# EAGLE board Keyboard (EAGLE 6.3), part 1 of 2
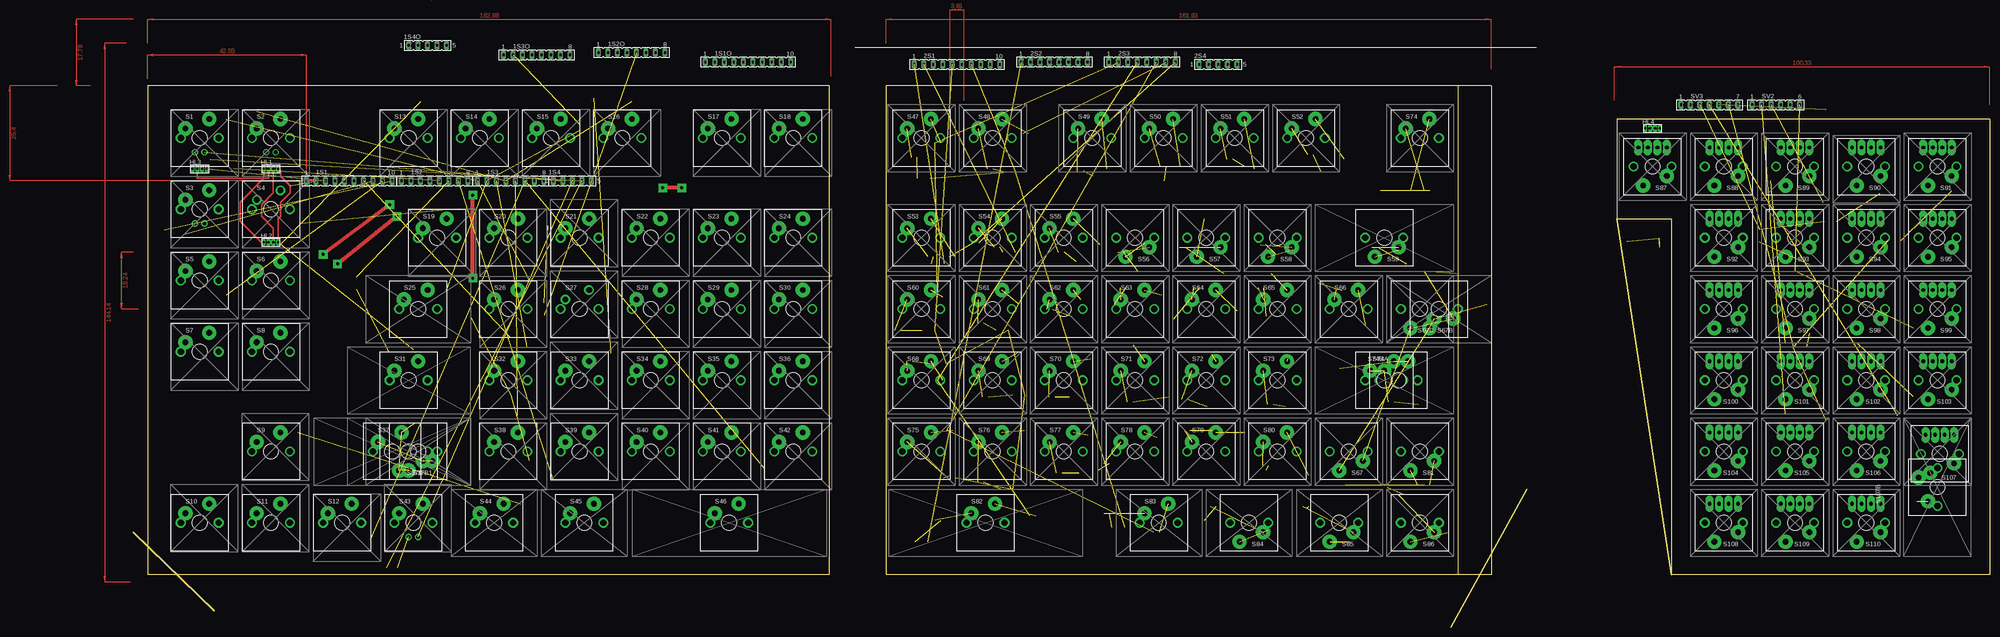
[diagram p0: board, top side]
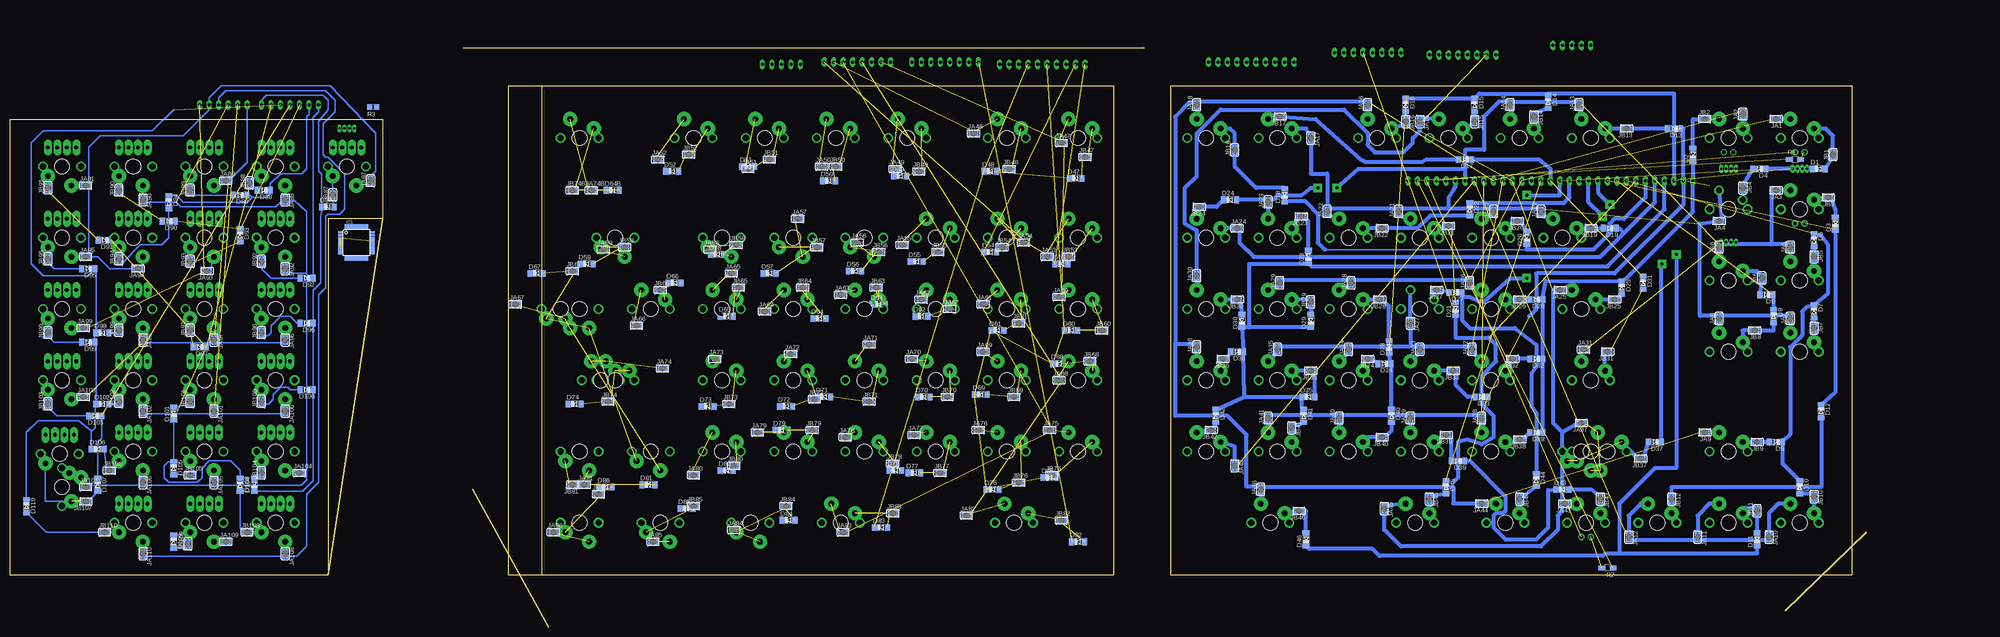
[diagram p1: board, bottom side, seen from below]

Size 496.57 x 154.94 mm. Coordinates in mm from the lower left corner, seen from the top.
Outline: 354.33,144.78 363.22,144.78 363.22,13.97 354.33,13.97
Outline: 354.33,144.78 201.3,144.78 201.3,13.97 354.33,13.97
Outline: 396.88,109.22 396.88,135.89 496.57,135.89 496.57,13.97 411.48,13.97
Outline: 375.29,154.94 193.04,154.94
Outline: 396.88,109.22 411.48,109.22 411.48,13.97
Outline: 396.88,109.22 411.48,13.97
Outline: 354.33,144.78 354.33,13.97
Outline: 0,25.4 21.59,4.45
Outline: 372.75,36.83 352.43,0
Outline: 186.06,144.78 186.06,13.97 3.81,13.97 3.81,144.78 186.06,144.78
Copper layers (1*16): Top 0.035mm / dielectric 1.5mm / Bottom 0.035mm
Design rules "default": minimum track width 10mil, minimum drill 24mil, track to track 8mil, track to pad 8mil, pad to pad 8mil, via to via 8mil, smd to smd 8mil, copper to edge 40mil, drill to drill 8mil, minimum pad ring 10mil, minimum via ring 8mil, stop-mask expansion 4mil, vias tented up to drill 0mil, thermal gap 10mil

## Footprints (pad centres in the part's own frame; a part is rotated, then mirrored left to right if it is on the bottom)
FE10 = drill 0.813 long: 1 -11.43,0; 2 -8.89,0; 3 -6.35,0; 4 -3.81,0; 5 -1.27,0; 6 1.27,0; 7 3.81,0; 8 6.35,0; 9 8.89,0; 10 11.43,0
FE08 = drill 0.813 long: 1 -8.89,0; 2 -6.35,0; 3 -3.81,0; 4 -1.27,0; 5 1.27,0; 6 3.81,0; 7 6.35,0; 8 8.89,0
FE05-1 = drill 0.813 long: 1 -5.08,0; 2 -2.54,0; 3 0,0; 4 2.54,0; 5 5.08,0
SOD80C = smd 1.4 x 1.8 bottom: A -1.7,0; C 1.7,0
RGB2X5 = drill 0.6 long: 1 -1.95,-0.585; 2 -0.65,-0.585; 3 0.65,-0.585; 4 1.95,-0.585
TQFP32-08 = smd 1.27 x 0.559: 1 -4.293,2.8; 2 -4.293,2; 3 -4.293,1.2; 4 -4.293,0.4; 5 -4.293,-0.4; 6 -4.293,-1.2; 7 -4.293,-2; 8 -4.293,-2.8; 17 4.293,-2.8; 18 4.293,-2; 19 4.293,-1.2; 20 4.293,-0.4; 21 4.293,0.4; 22 4.293,1.2; 23 4.293,2; 24 4.293,2.8 | smd 0.559 x 1.27: 9 -2.8,-4.293; 10 -2,-4.293; 11 -1.2,-4.293; 12 -0.4,-4.293; 13 0.4,-4.293; 14 1.2,-4.293; 15 2,-4.293; 16 2.8,-4.293; 25 2.8,4.293; 26 2,4.293; 27 1.2,4.293; 28 0.4,4.293; 29 -0.4,4.293; 30 -1.2,4.293; 31 -2,4.293; 32 -2.8,4.293
SJ = smd 1.168 x 1.6: 1 -0.762,0; 2 0.762,0
SJ' = smd 1.168 x 1.6 bottom: 1 0.762,0; 2 -0.762,0
R1206W = smd 1.8 x 1.2: 1 -1.499,0; 2 1.499,0
R0805 = smd 1.3 x 1.5: 1 -0.95,0; 2 0.95,0
CHERRY-MX-LED = drill 1.016 pad 1.676: LED1 -1.27,-3.81; LED2 1.27,-3.81 | drill 0.8 pad 1.27: P$1 0,0 | drill 1.714 pad 1.93: P$3 -5.08,0; P$4 5.08,0 | drill 1.5 pad 3.81: SW1 -3.81,2.54; SW2 2.54,5.08 | hole 4: 0,0
CHERRY-MX@1 = drill 1.714 pad 1.93: P$3 -5.08,0; P$4 5.08,0 | drill 1.5 pad 2.54: SW1 -3.81,2.54; SW2 2.54,5.08 | hole 4: 0,0
CHERRY-MX = drill 0.8: P$1 0,0 | drill 1.714 pad 1.93: P$3 -5.08,0; P$4 5.08,0 | drill 1.5 pad 3.81: SW1 -3.81,2.54; SW2 2.54,5.08 | hole 4: 0,0
CHERRY-MX-4P = drill 1.016 pad 2.184 long: D1 -3.81,-5.08; D2 3.81,-5.08; LED1 -1.27,-5.08; LED2 1.27,-5.08 | drill 1.714 pad 1.93: P$3 -5.08,0; P$4 5.08,0 | drill 1.5 pad 3.81: SW1 -3.81,2.54; SW2 2.54,5.08 | hole 4: 0,0
FE06 = drill 0.813 long: 1 -6.35,0; 2 -3.81,0; 3 -1.27,0; 4 1.27,0; 5 3.81,0; 6 6.35,0
FE07 = drill 0.813 long: 1 -7.62,0; 2 -5.08,0; 3 -2.54,0; 4 0,0; 5 2.54,0; 6 5.08,0; 7 7.62,0

## Placement (x,y rotation side)
1S1  [FE10]  57.78,119.38 0 top
1S1O  [FE10]  164.46,151.13 0 top
1S2  [FE08]  80.64,119.38 0 top
1S2O  [FE08]  133.35,153.67 0 top
1S3  [FE08]  100.97,119.38 0 top
1S3O  [FE08]  107.95,153.04 0 top
1S4  [FE05-1]  117.47,119.38 0 top
1S4O  [FE05-1]  78.74,155.58 0 top
2S1  [FE10]  220.35,150.5 0 top
2S2  [FE08]  246.38,151.13 0 top
2S3  [FE08]  269.88,151.13 0 top
2S4  [FE05-1]  290.19,150.5 0 top
D1  LL4148  [SOD80C]  12.7,122.55 0 top
D2  LL4148  [SOD80C]  46.35,126.36 270 top
D3  LL4148  [SOD80C]  8.25,107.95 270 top
D4  LL4148  [SOD80C]  28.58,122.55 180 top
D5  LL4148  [SOD80C]  13.97,103.5 90 top
D6  LL4148  [SOD80C]  26.67,88.9 180 top
D7  LL4148  [SOD80C]  13.97,84.45 90 top
D8  LL4148  [SOD80C]  24.77,83.19 90 top
D9  LL4148  [SOD80C]  24.13,49.53 180 top
D10  LL4148  [SOD80C]  17.78,37.46 90 top
D11  LL4148  [SOD80C]  29.21,23.49 270 top
D12  LL4148  [SOD80C]  12.06,57.78 90 top
D13  LL4148  [SOD80C]  51.44,133.35 180 top
D14  LL4148  [SOD80C]  85.09,140.5 90 top
D15  LL4148  [SOD80C]  104.78,139.7 90 top
D16  LL4148  [SOD80C]  123.19,139.7 90 top
D17  LL4148  [SOD80C]  107.31,125.09 180 top
D18  LL4148  [SOD80C]  155.57,115.57 270 top
D19  LL4148  [SOD80C]  68.58,106.68 180 top
D20  LL4148  [SOD80C]  90.8,104.14 270 top
D21  LL4148  [SOD80C]  109.86,85.09 270 top
D22  LL4148  [SOD80C]  106.05,111.76 90 top
D23  LL4148  [SOD80C]  149.23,99.06 270 top
D24  LL4148  [SOD80C]  170.18,114.3 0 top
D25  LL4148  [SOD80C]  65.41,90.8 90 top
D26  LL4148  [SOD80C]  88.27,87.63 180 top
D27  LL4148  [SOD80C]  109.86,89.53 180 top
D28  LL4148  [SOD80C]  127.64,74.93 270 top
D29  LL4148  [SOD80C]  148.59,81.91 270 top
D30  LL4148  [SOD80C]  167,81.91 270 top
D31  LL4148  [SOD80C]  59.69,92.08 90 top
D32  LL4148  [SOD80C]  88.27,71.75 180 top
D33  LL4148  [SOD80C]  102.87,61.59 180 top
D34  LL4148  [SOD80C]  128.9,70.48 180 top
D35  LL4148  [SOD80C]  149.23,61.59 0 top
D36  LL4148  [SOD80C]  168.27,73.66 180 top
D37  LL4148  [SOD80C]  56.52,49.53 180 top
D38  LL4148  [SOD80C]  88.27,52.07 180 top
D39  LL4148  [SOD80C]  109.22,44.45 180 top
D40  LL4148  [SOD80C]  127,56.52 90 top
D41  LL4148  [SOD80C]  150.5,56.52 90 top
D42  LL4148  [SOD80C]  173.99,56.52 90 top
D43  LL4148  [SOD80C]  81.28,36.83 0 top
D44  LL4148  [SOD80C]  88.27,39.37 90 top
D45  LL4148  [SOD80C]  112.39,37.46 90 top
D46  LL4148  [SOD80C]  149.86,23.49 270 top
D47  LL4148  [SOD80C]  211.45,120.02 0 top
D48  LL4148  [SOD80C]  234.31,121.92 0 top
D49  LL4148  [SOD80C]  258.44,120.65 0 top
D50  LL4148  [SOD80C]  277.5,119.38 0 top
D51  LL4148  [SOD80C]  299.09,123.19 0 top
D52  LL4148  [SOD80C]  319.41,121.92 0 top
D53  LL4148  [SOD80C]  215.26,97.16 0 top
D54  LL4148  [SOD80C]  234.31,100.33 0 top
D55  LL4148  [SOD80C]  254,97.79 0 top
D56  LL4148  [SOD80C]  270.51,95.25 0 top
D57  LL4148  [SOD80C]  293.37,94.61 0 top
D58  LL4148  [SOD80C]  307.34,99.69 0 top
D59  LL4148  [SOD80C]  342.26,97.16 0 top
D60  LL4148  [SOD80C]  212.73,79.38 0 top
D61  LL4148  [SOD80C]  232.41,79.38 0 top
D62  LL4148  [SOD80C]  252.73,83.19 0 top
D63  LL4148  [SOD80C]  264.16,86.36 0 top
D64  LL4148  [SOD80C]  280.04,82.55 0 top
D64B  LL4148  [SOD80C]  335.28,116.84 0 top
D65  LL4148  [SOD80C]  304.8,83.19 0 top
D66  LL4148  [SOD80C]  318.77,92.08 0 top
D67  LL4148  [SOD80C]  355.6,94.61 0 top
D68  LL4148  [SOD80C]  215.9,70.48 0 top
D69  LL4148  [SOD80C]  236.86,62.23 0 top
D70  LL4148  [SOD80C]  252.1,61.59 0 top
D71  LL4148  [SOD80C]  278.76,61.59 0 top
D72  LL4148  [SOD80C]  288.93,59.05 0 top
D73  LL4148  [SOD80C]  309.88,59.05 0 top
D74  LL4148  [SOD80C]  345.44,59.69 0 top
D75  LL4148  [SOD80C]  218.44,40 0 top
D76  LL4148  [SOD80C]  233.68,36.83 0 top
D77  LL4148  [SOD80C]  254.63,41.27 0 top
D78  LL4148  [SOD80C]  259.72,41.91 0 top
D79  LL4148  [SOD80C]  290.19,52.7 0 top
D80  LL4148  [SOD80C]  304.8,41.91 0 top
D81  LL4148  [SOD80C]  325.75,38.1 0 top
D82  LL4148  [SOD80C]  210.82,22.86 0 top
D83  LL4148  [SOD80C]  263.53,26.67 0 top
D84  LL4148  [SOD80C]  288.29,28.58 0 top
D85  LL4148  [SOD80C]  315.6,31.75 0 top
D86  LL4148  [SOD80C]  337.19,37.46 0 top
D87  LL4148  [SOD80C]  411.48,112.39 0 top
D88  LL4148  [SOD80C]  428.62,116.84 180 top
D89  LL4148  [SOD80C]  434.98,115.57 180 top
D90  LL4148  [SOD80C]  454.03,108.58 180 top
D91  LL4148  [SOD80C]  471.17,103.5 180 top
D92  LL4148  [SOD80C]  417.19,93.34 180 top
D93  LL4148  [SOD80C]  434.98,104.77 90 top
D94  LL4148  [SOD80C]  454.03,113.66 90 top
D95  LL4148  [SOD80C]  475.62,95.89 180 top
D96  LL4148  [SOD80C]  417.19,81.28 180 top
D97  LL4148  [SOD80C]  445.77,74.93 180 top
D98  LL4148  [SOD80C]  471.81,78.74 0 top
D99  LL4148  [SOD80C]  475.62,76.2 180 top
D100  LL4148  [SOD80C]  417.19,63.5 180 top
D101  LL4148  [SOD80C]  452.75,57.15 270 top
D102  LL4148  [SOD80C]  471.81,59.69 0 top
D103  LL4148  [SOD80C]  473.71,56.52 180 top
D104  LL4148  [SOD80C]  431.17,38.1 270 top
D105  LL4148  [SOD80C]  452.75,42.55 90 top
D106  LL4148  [SOD80C]  473.07,47.62 0 top
D107  LL4148  [SOD80C]  473.07,38.1 90 top
D108  LL4148  [SOD80C]  434.98,38.1 90 top
D109  LL4148  [SOD80C]  452.75,22.86 90 top
D110  LL4148  [SOD80C]  492.12,32.38 90 top
HL1  [RGB2X5]  36.83,123.19 0 top
HL2  [RGB2X5]  36.83,103.5 0 top
HL3  [RGB2X5]  17.78,123.19 0 top
HL4  [RGB2X5]  406.4,133.99 0 top
IC1  MEGA8-AI  [TQFP32-08]  403.86,102.87 0 bottom
JA1  [SJ]  24.13,135.89 180 bottom
JA2  [SJ]  33.02,137.16 90 bottom
JA3  [SJ]  24.13,116.84 180 bottom
JA4  [SJ]  39.37,108.58 180 bottom
JA5  [SJ]  20.32,101.6 90 bottom
JA6  [SJ]  39.37,101.6 90 bottom
JA7  [SJ]  20.32,82.55 90 bottom
JA8  [SJ]  39.37,82.55 90 bottom
JA9  [SJ]  43.18,52.07 180 bottom
JA10  [SJ]  26.03,24.13 270 bottom
JA11  [SJ]  45.09,24.13 270 bottom
JA12  [SJ]  63.5,24.13 270 bottom
JA13  [SJ']  76.83,139.7 270 top
JA14  [SJ']  95.25,139.7 270 top
JA15  [SJ']  119.38,135.26 90 top
JA16  [SJ']  133.35,139.7 270 top
JA17  [SJ']  148.59,130.81 90 top
JA18  [SJ']  179.07,139.7 270 top
JA19  [SJ']  87,111.12 270 top
JA20  [SJ']  99.69,111.12 270 top
JA21  [SJ']  125.1,111.12 270 top
JA22  [SJ']  144.14,111.12 270 top
JA23  [SJ']  160.02,113.66 270 top
JA24  [SJ']  168.27,106.68 0 top
JA25  [SJ']  81.92,90.17 180 top
JA26  [SJ']  106.05,92.08 270 top
JA27  [SJ']  121.92,81.28 90 top
JA28  [SJ']  137.8,92.08 270 top
JA29  [SJ']  156.85,92.08 270 top
JA30  [SJ']  179.07,93.98 270 top
JA31  [SJ']  75.56,74.3 0 top
JA32  [SJ']  105.41,74.3 270 top
JA33  [SJ']  119.38,74.3 270 top
JA34  [SJ']  138.43,74.3 270 top
JA35  [SJ']  157.48,74.3 270 top
JA36  [SJ']  179.07,74.93 270 top
JA37  [SJ']  76.2,54.61 180 top
JA38  [SJ']  102.87,55.88 270 top
JA39  [SJ']  121.92,55.88 270 top
JA40  [SJ']  140.97,55.88 270 top
JA41  [SJ']  160.02,55.88 270 top
JA42  [SJ']  168.91,43.18 90 top
JA43  [SJ']  80.64,33.02 180 top
JA44  [SJ']  102.87,33.02 180 top
JA45  [SJ']  128.9,31.75 90 top
JA46  [SJ']  161.93,36.83 270 top
JA47  [SJ']  215.26,129.54 0 top
JA48  [SJ']  238.76,132.08 0 top
JA49  [SJ']  259.72,122.55 0 top
JA50  [SJ']  279.4,123.19 0 top
JA51  [SJ']  299.09,122.55 0 top
JA52  [SJ']  323.22,125.09 0 top
JA53  [SJ']  219.07,99.06 0 top
JA54  [SJ']  225.43,102.87 0 top
JA55  [SJ']  257.81,102.23 0 top
JA56  [SJ']  269.88,102.87 0 top
JA57  [SJ']  285.75,109.22 0 top
JA58  [SJ']  309.25,100.97 0 top
JA59  [SJ']  337.82,100.97 0 top
JA60  [SJ']  215.9,88.27 0 top
JA61  [SJ']  236.22,86.36 0 top
JA62  [SJ']  252.73,87.63 0 top
JA63  [SJ']  274.32,88.9 0 top
JA64  [SJ']  294.64,84.45 0 top
JA65  [SJ']  303.53,94.61 0 top
JA66  [SJ']  328.93,80.64 0 top
JA67  [SJ']  361.31,86.36 0 top
JA68  [SJ']  215.9,66.04 0 top
JA69  [SJ']  236.22,73.66 0 top
JA70  [SJ']  255.27,71.75 0 top
JA71  [SJ']  266.7,75.56 0 top
JA72  [SJ']  287.66,73.02 0 top
JA73  [SJ']  307.98,71.75 0 top
JA74  [SJ']  321.94,69.22 0 top
JA74B  [SJ']  341,116.84 0 top
JA75  [SJ']  218.44,52.7 0 top
JA76  [SJ']  237.49,52.7 0 top
JA77  [SJ']  254.63,51.43 0 top
JA78  [SJ']  273.05,50.8 0 top
JA79  [SJ']  296.55,52.07 0 top
JA80  [SJ']  313.69,40.64 0 top
JA81  [SJ']  342.9,38.1 0 top
JA82  [SJ']  240.67,29.84 0 top
JA83  [SJ']  273.69,25.4 0 top
JA84  [SJ']  302.9,26.03 0 top
JA85  [SJ']  324.49,22.86 0 top
JA86  [SJ']  351.16,25.4 0 top
JA87  [SJ']  400.05,119.38 270 top
JA88  [SJ']  422.91,114.3 90 top
JA89  [SJ']  438.79,119.38 0 top
JA90  [SJ']  461.01,114.3 90 top
JA91  [SJ']  476.25,118.11 0 top
JA92  [SJ']  422.91,95.89 90 top
JA93  [SJ']  443.87,95.25 180 top
JA94  [SJ']  462.28,95.89 180 top
JA95  [SJ']  476.25,99.06 0 top
JA96  [SJ']  422.91,76.83 90 top
JA97  [SJ']  441.96,76.83 90 top
JA98  [SJ']  461.01,76.83 90 top
JA99  [SJ']  476.88,80.01 0 top
JA100  [SJ']  422.91,57.78 90 top
JA101  [SJ']  441.96,57.78 90 top
JA102  [SJ']  461.01,57.78 90 top
JA103  [SJ']  476.88,61.59 0 top
JA104  [SJ']  419.1,41.27 0 top
JA105  [SJ']  441.96,38.73 90 top
JA106  [SJ']  461.01,38.73 90 top
JA107  [SJ']  476.25,37.46 0 top
JA108  [SJ']  422.91,19.69 90 top
JA109  [SJ']  438.79,22.86 0 top
JA110  [SJ']  461.01,19.69 90 top
JB1  [SJ']  8.89,126.36 270 top
JB2  [SJ]  43.18,135.89 0 bottom
JB3  [SJ']  10.16,114.94 180 top
JB4  [SJ]  33.02,117.47 270 bottom
JB5  [SJ]  13.97,99.06 270 bottom
JB6  [SJ]  27.94,93.34 90 bottom
JB7  [SJ]  13.97,80.01 270 bottom
JB8  [SJ]  29.84,79.38 180 bottom
JB9  [SJ]  29.21,49.53 180 bottom
JB10  [SJ]  13.97,34.92 270 bottom
JB11  [SJ]  29.21,31.12 90 bottom
JB12  [SJ]  52.07,34.29 270 bottom
JB13  [SJ]  64.14,133.35 180 bottom
JB14  [SJ]  88.9,136.53 270 bottom
JB15  [SJ]  104.78,135.26 270 bottom
JB16  [SJ]  123.19,135.26 270 bottom
JB17  [SJ]  156.85,136.53 180 bottom
JB18  [SJ']  168.91,127.64 270 top
JB19  [SJ']  73.66,106.68 180 top
JB20  [SJ']  93.34,108.58 180 top
JB21  [SJ']  111.76,107.31 180 top
JB22  [SJ']  129.54,106.68 180 top
JB23  [SJ']  151.13,109.86 180 top
JB24  [SJ']  178.44,112.39 180 top
JB25  [SJ']  67.31,87.63 180 top
JB26  [SJ']  92.71,87.63 180 top
JB27  [SJ']  114.94,90.17 180 top
JB28  [SJ']  130.18,87.63 180 top
JB29  [SJ']  148.59,87 270 top
JB30  [SJ']  168.27,87.63 180 top
JB31  [SJ']  69.22,73.66 180 top
JB32  [SJ']  94.61,71.75 180 top
JB33  [SJ']  110.49,68.58 180 top
JB34  [SJ']  133.35,71.75 180 top
JB35  [SJ']  148.59,68.58 180 top
JB36  [SJ']  172.08,71.75 180 top
JB37  [SJ']  60.33,45.09 180 top
JB38  [SJ']  92.71,50.16 180 top
JB39  [SJ']  112.39,51.43 180 top
JB40  [SJ']  129.54,50.8 180 top
JB41  [SJ']  153.67,53.34 90 top
JB42  [SJ']  175.26,52.7 180 top
JB43  [SJ']  71.12,34.29 90 top
JB44  [SJ']  92.71,34.29 90 top
JB45  [SJ']  116.84,34.29 90 top
JB46  [SJ']  151.76,31.12 180 top
JB47  [SJ']  208.92,125.73 0 top
JB48  [SJ']  229.24,122.55 0 top
JB49  [SJ']  253.37,121.92 0 top
JB50  [SJ']  275.59,123.19 0 top
JB51  [SJ']  293.37,125.09 0 top
JB52  [SJ']  314.96,126.36 0 top
JB53  [SJ']  213.36,99.06 0 top
JB54  [SJ']  231.14,101.6 0 top
JB55  [SJ']  248.29,100.33 0 top
JB56  [SJ']  264.16,100.33 0 top
JB57  [SJ']  280.67,101.6 0 top
JB58  [SJ']  302.26,102.23 0 top
JB59  [SJ']  332.11,101.6 0 top
JB60  [SJ']  204.47,79.38 0 top
JB61  [SJ']  226.69,81.28 0 top
JB62  [SJ']  245.11,85.09 0 top
JB63  [SJ']  264.8,90.8 0 top
JB64  [SJ']  284.48,90.8 0 top
JB65  [SJ']  301.62,90.8 0 top
JB66  [SJ']  322.58,90.17 0 top
JB67  [SJ']  346.07,95.25 0 top
JB68  [SJ']  207.64,71.12 0 top
JB69  [SJ']  227.96,61.59 0 top
JB70  [SJ']  245.75,61.59 0 top
JB71  [SJ']  266.7,60.32 0 top
JB72  [SJ']  281.31,60.96 0 top
JB73  [SJ']  304.17,59.69 0 top
JB74  [SJ']  336.55,60.32 0 top
JB74B  [SJ']  346.07,116.84 0 top
JB75  [SJ']  217.81,40.64 0 top
JB76  [SJ']  226.69,38.73 0 top
JB77  [SJ']  247.65,41.27 0 top
JB78  [SJ']  260.35,43.81 0 top
JB79  [SJ']  281.94,52.7 0 top
JB80  [SJ']  302.9,43.18 0 top
JB81  [SJ']  346.07,38.1 180 top
JB82  [SJ']  215.26,28.58 0 top
JB83  [SJ']  260.35,30.48 0 top
JB84  [SJ']  288.93,32.38 0 top
JB85  [SJ']  313.69,32.38 0 top
JB86  [SJ']  339.09,35.56 0 top
JB87  [SJ']  410.21,115.57 270 top
JB88  [SJ']  432.44,118.75 270 top
JB89  [SJ']  448.31,116.84 270 top
JB90  [SJ']  467.36,116.84 270 top
JB91  [SJ']  486.41,117.47 270 top
JB92  [SJ']  429.26,97.79 270 top
JB93  [SJ']  448.31,97.79 270 top
JB94  [SJ']  467.36,98.42 270 top
JB95  [SJ']  486.41,98.42 270 top
JB96  [SJ']  429.26,78.74 270 top
JB97  [SJ']  448.31,79.38 270 top
JB98  [SJ']  467.36,79.38 270 top
JB99  [SJ']  486.41,78.74 270 top
JB100  [SJ']  429.26,60.32 270 top
JB101  [SJ']  448.31,60.32 270 top
JB102  [SJ']  467.36,60.32 270 top
JB103  [SJ']  486.41,59.69 270 top
JB104  [SJ']  429.26,41.27 270 top
JB105  [SJ']  448.31,40.64 0 top
JB106  [SJ']  469.9,41.91 0 top
JB107  [SJ']  476.25,33.66 180 top
JB108  [SJ']  433.07,25.4 0 top
JB109  [SJ']  448.94,22.23 270 top
JB110  [SJ']  471.17,25.4 0 top
R1  1k  [R1206W]  19.05,125.09 0 bottom
R2  1k  [R1206W]  69.22,15.88 180 bottom
R3  1k  [R0805]  399.42,139.07 180 bottom
S1  Scroll Lock  [CHERRY-MX-LED]  17.78,130.81 0 top
S2  ESC  [CHERRY-MX-LED]  36.83,130.81 0 top
S3  Ins  [CHERRY-MX-LED]  17.78,111.76 0 top
S4  Pause  [CHERRY-MX@1]  36.83,111.76 0 top
S5  Home  [CHERRY-MX]  17.78,92.71 0 top
S6  P Up  [CHERRY-MX]  36.83,92.71 0 top
S7  End  [CHERRY-MX]  17.78,73.66 0 top
S8  P Dn  [CHERRY-MX]  36.83,73.66 0 top
S9  Up  [CHERRY-MX]  36.83,46.99 0 top
S10  Left  [CHERRY-MX]  17.78,27.94 0 top
S11  Down  [CHERRY-MX]  36.83,27.94 0 top
S12  Right  [CHERRY-MX]  55.88,27.94 0 top
S13  F1  [CHERRY-MX]  73.66,130.81 0 top
S14  F2  [CHERRY-MX]  92.71,130.81 0 top
S15  F3  [CHERRY-MX]  111.76,130.81 0 top
S16  F4  [CHERRY-MX]  130.81,130.81 0 top
S17  F5  [CHERRY-MX]  157.48,130.81 0 top
S18  F6  [CHERRY-MX]  176.53,130.81 0 top
S19  1  [CHERRY-MX]  81.28,104.14 0 top
S20  2  [CHERRY-MX]  100.33,104.14 0 top
S21  3  [CHERRY-MX]  119.38,104.14 0 top
S22  4  [CHERRY-MX]  138.43,104.14 0 top
S23  5  [CHERRY-MX]  157.48,104.14 0 top
S24  6  [CHERRY-MX]  176.53,104.14 0 top
S25  TAB  [CHERRY-MX]  76.2,85.09 0 top
S26  Q  [CHERRY-MX]  100.33,85.09 0 top
S27  W  [CHERRY-MX@1]  119.38,85.09 0 top
S28  E  [CHERRY-MX]  138.43,85.09 0 top
S29  R  [CHERRY-MX]  157.48,85.09 0 top
S30  T  [CHERRY-MX]  176.53,85.09 0 top
S31  LCtrl  [CHERRY-MX]  73.66,66.04 0 top
S32  A  [CHERRY-MX]  100.33,66.04 0 top
S33  S  [CHERRY-MX]  119.38,66.04 0 top
S34  D  [CHERRY-MX]  138.43,66.04 0 top
S35  F  [CHERRY-MX]  157.48,66.04 0 top
S36  G  [CHERRY-MX]  176.53,66.04 0 top
S37  L Shift  [CHERRY-MX]  69.22,46.99 0 top
S37B  L Shift  [CHERRY-MX]  73.66,46.99 180 top
S37B1  L Shift  [CHERRY-MX]  76.2,46.99 180 top
S38  Z  [CHERRY-MX]  100.33,46.99 0 top
S39  X  [CHERRY-MX]  119.38,46.99 0 top
S40  C  [CHERRY-MX]  138.43,46.99 0 top
S41  V  [CHERRY-MX]  157.48,46.99 0 top
S42  B  [CHERRY-MX]  176.53,46.99 0 top
S43  Caps Lock  [CHERRY-MX-LED]  74.93,27.94 0 top
S44  Alt  [CHERRY-MX]  96.52,27.94 0 top
S45  Menu(Win)  [CHERRY-MX]  120.65,27.94 0 top
S46  Space  [CHERRY-MX]  159.38,27.94 0 top
S47  F7  [CHERRY-MX]  210.82,130.81 0 top
S48  F8  [CHERRY-MX]  229.87,130.81 0 top
S49  F9  [CHERRY-MX]  256.54,130.81 0 top
S50  F10  [CHERRY-MX]  275.59,130.81 0 top
S51  F11  [CHERRY-MX]  294.64,130.81 0 top
S52  F12  [CHERRY-MX]  313.69,130.81 0 top
S53  7  [CHERRY-MX]  210.82,104.14 0 top
S54  8  [CHERRY-MX]  229.87,104.14 0 top
S55  9  [CHERRY-MX]  248.92,104.14 0 top
S56  0  [CHERRY-MX]  267.97,104.14 180 top
S57  -  [CHERRY-MX]  287.02,104.14 180 top
S58  =  [CHERRY-MX]  306.07,104.14 180 top
S59  BS  [CHERRY-MX]  334.65,104.14 180 top
S60  Y  [CHERRY-MX]  210.82,85.09 0 top
S61  U  [CHERRY-MX]  229.87,85.09 0 top
S62  I  [CHERRY-MX]  248.92,85.09 0 top
S63  O  [CHERRY-MX]  267.97,85.09 0 top
S64  P  [CHERRY-MX]  287.02,85.09 0 top
S65  [  [CHERRY-MX]  306.07,85.09 0 top
S66  ]  [CHERRY-MX]  325.12,85.09 0 top
S67  |  [CHERRY-MX]  325.12,46.99 180 top
S67B  |  [CHERRY-MX]  349.25,85.09 180 top
S67C  |  [CHERRY-MX]  344.17,85.09 180 top
S68  H  [CHERRY-MX]  210.82,66.04 0 top
S69  J  [CHERRY-MX]  229.87,66.04 0 top
S70  K  [CHERRY-MX]  248.92,66.04 0 top
S71  L  [CHERRY-MX]  267.97,66.04 0 top
S72  :  [CHERRY-MX]  287.02,66.04 0 top
S73  "  [CHERRY-MX]  306.07,66.04 0 top
S74  Del  [CHERRY-MX]  344.17,130.81 0 top
S74A  Enter  [CHERRY-MX]  338.46,66.04 0 top
S74B  Enter  [CHERRY-MX]  334.65,66.04 0 top
S75  N  [CHERRY-MX]  210.82,46.99 0 top
S76  M  [CHERRY-MX]  229.87,46.99 0 top
S77  <  [CHERRY-MX]  248.92,46.99 0 top
S78  >  [CHERRY-MX]  267.97,46.99 0 top
S79  ~  [CHERRY-MX]  287.02,46.99 0 top
S80  ?  [CHERRY-MX]  306.07,46.99 0 top
S81  R Shift  [CHERRY-MX]  344.17,46.99 180 top
S82  Space  [CHERRY-MX]  227.96,27.94 0 top
S83  Mouse2(Menu)  [CHERRY-MX]  274.32,27.94 0 top
S84  Alt  [CHERRY-MX]  298.45,27.94 180 top
S85  RCtrl  [CHERRY-MX]  322.58,27.94 180 top
S86  PrtScr  [CHERRY-MX]  344.17,27.94 180 top
S87  Num  [CHERRY-MX-4P]  406.4,123.19 180 top
S88  D  [CHERRY-MX-4P]  425.45,123.19 180 top
S89  E  [CHERRY-MX-4P]  444.5,123.19 180 top
S90  F  [CHERRY-MX-4P]  463.55,123.19 180 top
S91  /  [CHERRY-MX-4P]  482.6,123.19 180 top
S92  A  [CHERRY-MX-4P]  425.45,104.14 180 top
S93  B  [CHERRY-MX-4P]  444.5,104.14 180 top
S94  C  [CHERRY-MX-4P]  463.55,104.14 180 top
S95  *  [CHERRY-MX-4P]  482.6,104.14 180 top
S96  7  [CHERRY-MX-4P]  425.45,85.09 180 top
S97  8  [CHERRY-MX-4P]  444.5,85.09 180 top
S98  9  [CHERRY-MX-4P]  463.55,85.09 180 top
S99  -  [CHERRY-MX-4P]  482.6,85.09 180 top
S100  4  [CHERRY-MX-4P]  425.45,66.04 180 top
S101  5  [CHERRY-MX-4P]  444.5,66.04 180 top
S102  6  [CHERRY-MX-4P]  463.55,66.04 180 top
S103  +  [CHERRY-MX-4P]  482.6,66.04 180 top
S104  1  [CHERRY-MX-4P]  425.45,46.99 180 top
S105  2  [CHERRY-MX-4P]  444.5,46.99 180 top
S106  3  [CHERRY-MX-4P]  463.55,46.99 180 top
S107  NumEnter  [CHERRY-MX-4P]  483.24,46.35 180 top
S107B  NumEnter  [CHERRY-MX]  482.6,37.46 90 top
S108  0  [CHERRY-MX-4P]  425.45,27.94 180 top
S109  00  [CHERRY-MX-4P]  444.5,27.94 180 top
S110  .  [CHERRY-MX-4P]  463.55,27.94 180 top
SV2  [FE06]  439.42,139.7 0 top
SV3  [FE07]  421.64,139.7 0 top
U$1  [18X18]  17.78,130.81 0 top
U$2  [18X18]  36.83,130.81 0 top
U$3  [18X18]  17.78,111.76 0 top
U$4  [18X18]  17.78,92.71 0 top
U$5  [18X18]  36.83,111.76 0 top
U$6  [18X18]  17.78,73.66 0 top
U$7  [18X18]  36.83,92.71 0 top
U$8  [18X18]  36.83,73.66 0 top
U$9  [18X18]  55.88,27.94 0 top
U$10  [18X18]  36.83,27.94 90 top
U$11  [18X18]  36.83,46.99 90 top
U$12  [18X18]  119.38,46.99 90 top
U$13  [18X18]  17.78,27.94 90 top
U$14  [18X18]  74.93,27.94 90 top
U$15  [18X23]  96.52,27.94 0 top
U$16  [18X23]  120.65,27.94 0 top
U$17  [18X52]  159.38,27.94 0 top
U$18  [18X18]  100.33,46.99 0 top
U$19  [18X18]  176.53,46.99 0 top
U$20  [18X18]  157.48,46.99 0 top
U$21  [18X18]  138.43,46.99 0 top
U$22  [18X42]  69.22,46.99 0 top
U$23  [18X18]  119.38,66.04 90 top
U$24  [18X18]  100.33,66.04 0 top
U$25  [18X18]  176.53,66.04 0 top
U$26  [18X18]  157.48,66.04 0 top
U$27  [18X18]  138.43,66.04 0 top
U$28  [18X33]  73.66,66.04 0 top
U$29  [18X18]  119.38,85.09 90 top
U$30  [18X18]  100.33,85.09 0 top
U$31  [18X18]  176.53,85.09 0 top
U$32  [18X18]  157.48,85.09 0 top
U$33  [18X18]  138.43,85.09 0 top
U$34  [18X28]  76.2,85.09 0 top
U$35  [18X18]  119.38,104.14 90 top
U$36  [18X18]  100.33,104.14 0 top
U$37  [18X18]  176.53,104.14 0 top
U$38  [18X18]  157.48,104.14 0 top
U$39  [18X18]  138.43,104.14 0 top
U$40  [18X18]  81.28,104.14 0 top
U$41  [18X18]  176.53,130.81 0 top
U$42  [18X18]  157.48,130.81 0 top
U$43  [18X18]  111.76,130.81 0 top
U$44  [18X18]  130.81,130.81 0 top
U$45  [18X18]  92.71,130.81 0 top
U$46  [18X18]  73.66,130.81 0 top
U$47  [18X18]  209.55,132.08 0 top
U$48  [18X18]  228.6,132.08 0 top
U$49  [18X18]  293.37,132.08 0 top
U$50  [18X18]  255.27,132.08 0 top
U$51  [18X18]  274.32,132.08 0 top
U$52  [18X18]  312.42,132.08 0 top
U$53  [18X18]  209.55,105.41 0 top
U$54  [18X18]  228.6,105.41 0 top
U$55  [18X18]  247.65,105.41 0 top
U$56  [18X18]  266.7,105.41 0 top
U$57  [18X18]  285.75,105.41 0 top
U$58  [18X18]  304.8,105.41 0 top
U$59  [18X18]  209.55,86.36 0 top
U$60  [18X18]  228.6,86.36 0 top
U$61  [18X18]  247.65,86.36 0 top
U$62  [18X18]  266.7,86.36 0 top
U$63  [18X18]  285.75,86.36 0 top
U$64  [18X18]  304.8,86.36 0 top
U$65  [18X18]  323.85,86.36 0 top
U$66  [18X18]  342.9,86.36 0 top
U$67  [18X18]  209.55,67.31 0 top
U$68  [18X18]  228.6,67.31 0 top
U$69  [18X18]  247.65,67.31 0 top
U$70  [18X18]  266.7,67.31 0 top
U$71  [18X18]  285.75,67.31 0 top
U$72  [18X18]  304.8,67.31 0 top
U$73  [18X18]  209.55,48.26 0 top
U$74  [18X18]  228.6,48.26 0 top
U$75  [18X18]  247.65,48.26 0 top
U$76  [18X18]  266.7,48.26 0 top
U$77  [18X18]  285.75,48.26 0 top
U$78  [18X18]  304.8,48.26 0 top
U$79  [18X52]  227.96,27.94 0 top
U$80  [18X37]  334.65,104.14 0 top
U$83  [18X18]  342.9,29.21 0 top
U$84  [18X23]  322.58,27.94 0 top
U$85  [18X23]  298.45,27.94 0 top
U$86  [18X23]  274.32,27.94 0 top
U$87  [18X18]  405.13,124.46 0 top
U$88  [18X18]  424.18,124.46 0 top
U$89  [18X18]  443.23,124.46 0 top
U$90  [18X18]  462.28,123.83 0 top
U$91  [18X18]  481.33,124.46 0 top
U$92  [18X18]  481.33,105.41 0 top
U$93  [18X18]  462.28,105.41 0 top
U$94  [18X18]  443.23,105.41 0 top
U$95  [18X18]  424.18,105.41 0 top
U$96  [18X18]  424.18,86.36 0 top
U$97  [18X18]  443.23,86.36 0 top
U$98  [18X18]  462.28,86.36 0 top
U$99  [18X18]  481.33,86.36 0 top
U$100  [18X18]  424.18,67.31 0 top
U$101  [18X18]  443.23,67.31 0 top
U$102  [18X18]  462.28,67.31 0 top
U$103  [18X18]  481.33,67.31 0 top
U$104  [18X18]  424.18,48.26 0 top
U$105  [18X18]  443.23,48.26 0 top
U$106  [18X18]  462.28,48.26 0 top
U$107  [18X18]  481.33,48.26 0 top
U$108  [18X18]  424.18,29.21 0 top
U$109  [18X18]  443.23,29.21 0 top
U$110  [18X18]  462.28,29.21 0 top
U$111  [37X18]  482.6,37.46 0 top
U$112  [18X37]  334.65,66.04 0 top
U$113  [18X28]  349.25,85.09 0 top
U$114  [18X33]  73.66,46.99 0 top
U$115  [18X28]  76.2,46.99 0 top
U$116  [18X18]  342.9,132.08 0 top
U$117  [18X18]  323.85,48.26 0 top
U$118  [18X18]  342.9,48.26 0 top

## Library data of the parts
1S1 1S1O 1S2 1S2O 1S3 1S3O 1S4 1S4O 2S1-2S4 SV2 SV3 = con-lsta; OC_FARNELL: unknown; OC_NEWARK: unknown
D1-D64 D64B D65-D110 JA13-JA74 JA74B JA75-JA110 JB1 JB3 JB18-JB74 JB74B JB75-JB110 = detali
HL1-HL4 = led
IC1 = atmel; MPN: ATMEGA8-16AU; OC_FARNELL: 9171371; OC_NEWARK: 73M8863
JA1-JA12 JB2 JB4-JB17 = jumper
R1-R3 = rcl
S1-S37 S37B S37B1 S38-S67 S67B S67C S68-S74 S74A S74B S75-S107 S107B S108-S110 = cherrymx
U$1-U$80 U$83-U$118 = kbmx

## Nets
2A1: JA61.2
2A2: 2S3.2 JA47.2 JA60.2
2A3: JA69.2
2A4: 2S3.4 JA68.2 JA82.2
2A5: JA76.2
2A6: 2S3.6 JA75.2 JA83.2
2A7: 2S3.7 JA48.2
2A8: 2S3.8 JA53.2 JA54.2
2B0: 2S1.1 D53.C
2B1: 2S1.2 D54.C
2B4: 2S1.5 D60.C D61.C D68.C D69.C D75.C D76.C
2B6: 2S1.7 D47.C D48.C D83.C
2B10: 2S2.1 D82.C
3A1: JA89.2 JA96.2 JA97.2 JA98.2 JA103.2 SV2.1
3A2: JA100.2 JA101.2 JA102.2 SV2.2
3A3: JA88.2 JA90.2 JA92.2 JA104.2 JA105.2 JA106.2 JA107.2 SV2.3
3A4: JA108.2 JA110.2 SV2.4
3A5: JA87.2 JA91.2 JA94.2 JA95.2 SV2.5
3A6: JA93.2 JA99.2 SV2.6
3B0: D92.C SV3.1
3B2: D88.C D89.C D94.C SV3.2
3B3: D90.C D93.C SV3.3
3B7: D103.C D107.C SV3.4
3B8: D95.C D98.C D99.C D102.C D106.C D110.C SV3.5
3B9: D91.C D97.C D101.C D105.C D108.C SV3.6
3B10: D87.C D96.C D100.C D104.C SV3.7
+5V_K1: 1S4.4 R1.1 R2.1
A1: 1S3.1 JA1.2 JA26.2 JA28.2 JA29.2
A2: 1S3.2 1S3O.2 JA15.2 JA25.2 JA30.2 JA37.2 JA43.2 JA45.2
A3: 1S3.3 JA27.2 JA32.2 JA33.2 JA34.2 JA35.2
A4: 1S3.4 JA2.2 JA9.2 JA16.2 JA18.2 JA36.2 JA44.2 JA46.2
A5: 1S3.5 JA38.2 JA39.2 JA40.2 JA41.2
A6: 1S3.6 JA10.2 JA11.2 JA12.2 JA42.2
A7: 1S3.7 D24.A JA3.2 JA5.2 JA6.2 JA13.2 JA14.2 JA23.2 JA31.2
A8: 1S3.8 JA4.2 JA7.2 JA8.2 JA17.2 JA19.2 JA20.2 JA21.2 JA22.2
AVCC: IC1.18
B0: 1S1.1 D2.C D25.C D26.C D32.C D38.C
B1: 1S1.2 D13.C D33.C D39.C D43.C HL1.4 HL2.4
B2: 1S1.3 D14.C D15.C D16.C D28.C D34.C D40.C HL3.4
B3: 1S1.4 D23.C D29.C D30.C D35.C D36.C D41.C D42.C
B4: 1S1.5 D19.C JA24.2
B5: 1S1.6 D18.C D20.C
B6: 1S1.7 1S2O.5 D21.C
B7: 1S1.8 D5.C D7.C D9.C D10.C
B8: 1S1.9 D6.C D8.C
B9: 1S1.10 D3.C D12.C
B10: 1S2.1 D11.C D46.C
B11: 1S2.2 D37.C
B12: 1S2.3
B13: 1S2.4 D22.C
B14: 1S2.5 D1.C D4.C D27.C D44.C
B15: 1S2.6 D17.C D31.C
B16: 1S2.7 D45.C
B17: 1S2.8
G1: HL1.3 HL2.3
G2: HL3.3
GND: IC1.3 IC1.5 IC1.21
GND_K1: 1S4.5
GND_K2: R3.1
K1: HL1.2 HL3.2
LED_CAPS: 1S4.3 S43.LED2
LED_NUM: 1S4.1
LED_SCR: 1S4.2 S1.LED2
N$1: D15.A JB15.1
N$2: JB4.2 S4.SW1
N$3: D1.A JB1.1
N$4: JA4.1 S4.SW2
N$5: JB14.2 S14.SW1
N$6: JB20.2 S20.SW1
N$7: JB32.2 S32.SW1
N$8: JB38.2 S38.SW1
N$9: JB6.2 S6.SW1
N$10: JA6.1 S6.SW2
N$11: JA8.1 S8.SW2
N$12: JB8.2 S8.SW1
N$13: JB10.2 S10.SW1
N$14: JB1.2 S1.SW1
N$15: D2.A JB2.1
N$16: JB2.2 S2.SW2
N$17: JA2.1 S2.SW1
N$18: D16.A JB16.1
N$19: JB3.2 S3.SW1
N$20: JB5.2 S5.SW1
N$21: JB7.2 S7.SW1
N$22: JB9.2 S9.SW1
N$23: JB11.2 S11.SW1
N$24: D3.A JB3.1
N$25: JB12.2 S12.SW1
N$26: D5.A JB5.1
N$27: D7.A JB7.1
N$28: JA10.1 S10.SW2
N$29: JA1.1 S1.SW2
N$30: D9.A JB9.1
N$31: D11.A JB11.1
N$32: JA3.1 S3.SW2
N$33: JA5.1 S5.SW2
N$34: JA7.1 S7.SW2
N$35: JA9.1 S9.SW2
N$36: JA11.1 S11.SW2
N$37: JA12.1 S12.SW2
N$38: JA14.1 S14.SW2
N$39: JB13.2 S13.SW1
N$40: JA13.1 S13.SW2
N$41: D14.A JB14.1
N$42: JB42.2 S42.SW2
N$43: JA42.1 S42.SW1
N$44: JB27.2 S27.SW1
N$45: JA27.1 S27.SW2
N$46: JB17.2 S17.SW2
N$47: JA17.1 S17.SW1
N$48: D24.C JB24.1
N$49: JB24.2 S24.SW2
N$50: JA24.1 S24.SW1
N$51: JA107.1 S107.SW2 S107B.SW2
N$52: D4.A JB4.1
N$53: D6.A JB6.1
N$54: D8.A JB8.1
N$55: D10.A JB10.1
N$56: D12.A JB12.1
N$57: D13.A JB13.1
N$58: JB19.2 S19.SW1
N$59: JB25.2 S25.SW1
N$60: D104.A JB104.1
N$61: JB31.2 S31.SW1
N$62: JB37.2 S37.SW1 S37B1.SW1 S37B.SW1
N$63: JB43.2 S43.SW1
N$64: JB26.2 S26.SW1
N$65: JB44.2 S44.SW1
N$66: JB18.2 S18.SW1
N$68: JB30.2 S30.SW1
N$69: JB36.2 S36.SW1
N$70: JB74B.2 S74.SW1
N$71: JB52.2 S52.SW1
N$72: JB23.2 S23.SW1
N$73: JB29.2 S29.SW1
N$74: JB35.2 S35.SW1
N$75: JB41.2 S41.SW1
N$76: JB16.2 S16.SW1
N$77: JB22.2 S22.SW1
N$78: JB28.2 S28.SW1
N$79: JB34.2 S34.SW1
N$80: JB40.2 S40.SW1
N$81: JB46.2 S46.SW1
N$82: JB15.2 S15.SW1
N$83: JB21.2 S21.SW1
N$84: JB63.2 S63.SW1
N$85: JB33.2 S33.SW1
N$86: JB39.2 S39.SW1
N$87: JB45.2 S45.SW1
N$88: JA15.1 S15.SW2
N$89: JB73.2 S73.SW1
N$90: JA18.1 S18.SW2
N$91: JA20.1 S20.SW2
N$92: JA22.1 S22.SW2
N$93: JA23.1 S23.SW2
N$94: JB74.2 S74A.SW1 S74B.SW1
N$95: JA25.1 S25.SW2
N$96: JA26.1 S26.SW2
N$97: JA74.1 S74A.SW2 S74B.SW2
N$98: JA28.1 S28.SW2
N$99: JA29.1 S29.SW2
N$100: JA30.1 S30.SW2
N$101: JA31.1 S31.SW2
N$102: JA32.1 S32.SW2
N$103: JA33.1 S33.SW2
N$104: JA34.1 S34.SW2
N$105: JA35.1 S35.SW2
N$106: JA36.1 S36.SW2
N$107: JA37.1 S37.SW2 S37B1.SW2 S37B.SW2
N$108: JA38.1 S38.SW2
N$109: JA39.1 S39.SW2
N$110: JA40.1 S40.SW2
N$111: JA41.1 S41.SW2
N$112: JB47.2 S47.SW1
N$113: JA43.1 S43.SW2
N$114: JA45.1 S45.SW2
N$115: JA46.1 S46.SW2
N$116: JA19.1 S19.SW2
N$117: JA44.1 S44.SW2
N$118: JA21.1 S21.SW2
N$119: JA16.1 S16.SW2
N$120: D17.A JB17.1
N$121: D18.A JB18.1
N$122: D19.A JB19.1
N$123: D20.A JB20.1
N$124: D21.A JB21.1
N$125: D22.A JB22.1
N$126: D23.A JB23.1
N$127: JB53.2 S53.SW1
N$128: D25.A JB25.1
N$129: D26.A JB26.1
N$130: D27.A JB27.1
N$131: D28.A JB28.1
N$132: D29.A JB29.1
N$133: D30.A JB30.1
N$134: D31.A JB31.1
N$135: D32.A JB32.1
N$136: D33.A JB33.1
N$137: D34.A JB34.1
N$138: D35.A JB35.1
N$139: D36.A JB36.1
N$140: D37.A JB37.1
N$141: D38.A JB38.1
N$142: D39.A JB39.1
N$143: D40.A JB40.1
N$144: D41.A JB41.1
N$145: D42.A JB42.1
N$146: D43.A JB43.1
N$147: D44.A JB44.1
N$148: D45.A JB45.1
N$149: D46.A JB46.1
N$150: R1.2 S1.LED1
N$151: R2.2 S43.LED1
N$152: R3.2
N$153: JB60.2 S60.SW1
N$154: JB68.2 S68.SW1
N$155: JB75.2 S75.SW1
N$156: JB82.2 S82.SW1
N$157: JB48.2 S48.SW1
N$158: JB54.2 S54.SW1
N$159: JB61.2 S61.SW1
N$160: JB69.2 S69.SW1
N$161: JB76.2 S76.SW1
N$162: JB83.2 S83.SW1
N$163: JB49.2 S49.SW1
N$164: JB55.2 S55.SW1
N$165: JB62.2 S62.SW1
N$166: JB70.2 S70.SW1
N$167: JB77.2 S77.SW1
N$168: JB84.2 S84.SW1
N$169: JB50.2 S50.SW1
N$170: JB56.2 S56.SW1
N$171: JB71.2 S71.SW1
N$172: JB78.2 S78.SW1
N$173: JB85.2 S85.SW1
N$174: JB51.2 S51.SW1
N$175: JB57.2 S57.SW1
N$176: JB64.2 S64.SW1
N$177: JB72.2 S72.SW1
N$178: JB79.2 S79.SW1
N$179: JB86.2 S86.SW1
N$180: JB58.2 S58.SW1
N$181: JB65.2 S65.SW1
N$182: JB80.2 S80.SW1
N$183: JB59.2 S59.SW1
N$184: JB66.2 S66.SW1
N$185: JB67.2 S67.SW1 S67B.SW1 S67C.SW2
N$186: JB81.2 S81.SW1
N$187: D47.A JB47.1
N$188: D53.A JB53.1
N$189: D60.A JB60.1
N$190: D68.A JB68.1
N$191: D75.A JB75.1
N$192: D82.A JB82.1
N$193: D48.A JB48.1
N$194: D54.A JB54.1
N$195: D61.A JB61.1
N$196: D69.A JB69.1
N$197: D76.A JB76.1
N$198: D83.A JB83.1
N$199: D49.A JB49.1
N$200: D55.A JB55.1
N$201: D62.A JB62.1
N$202: D70.A JB70.1
N$203: D77.A JB77.1
N$204: D84.A JB84.1
N$205: D50.A JB50.1
N$206: D56.A JB56.1
N$207: D63.A JB63.1
N$208: D71.A JB71.1
N$209: D78.A JB78.1
N$210: D85.A JB85.1
N$211: D51.A JB51.1
N$212: D57.A JB57.1
N$213: D64.A JB64.1
N$214: D72.A JB72.1
N$215: D79.A JB79.1
N$216: D86.A JB86.1
N$217: D52.A JB52.1
N$218: D58.A JB58.1
N$219: D65.A JB65.1
N$220: D73.A JB73.1
N$221: D80.A JB80.1
N$222: D59.A JB59.1
N$223: D66.A JB66.1
N$224: D67.A JB67.1
N$225: D74.A JB74.1
N$226: D81.A JB81.1
N$227: JA66.1 S66.SW2
N$228: JA47.1 S47.SW2
N$229: JA53.1 S53.SW2
N$230: JA60.1 S60.SW2
N$231: JA68.1 S68.SW2
N$232: JA75.1 S75.SW2
N$233: JA82.1 S82.SW2
N$234: JA48.1 S48.SW2
N$235: JA54.1 S54.SW2
N$236: JA61.1 S61.SW2
N$237: JA69.1 S69.SW2
N$238: JA76.1 S76.SW2
N$239: JA83.1 S83.SW2
N$240: JA49.1 S49.SW2
N$241: JA55.1 S55.SW2
N$242: JA62.1 S62.SW2
N$243: JA70.1 S70.SW2
N$244: JA77.1 S77.SW2
N$245: JA84.1 S84.SW2
N$246: JA50.1 S50.SW2
N$247: JA56.1 S56.SW2
N$248: JA63.1 S63.SW2
N$249: JA71.1 S71.SW2
N$250: JA78.1 S78.SW2
N$251: JA85.1 S85.SW2
N$252: JA51.1 S51.SW2
N$253: JA57.1 S57.SW2
N$254: JA64.1 S64.SW2
N$255: JA72.1 S72.SW2
N$256: JA79.1 S79.SW2
N$257: JA86.1 S86.SW2
N$258: JA52.1 S52.SW2
N$259: JA58.1 S58.SW2
N$260: JA65.1 S65.SW2
N$261: JA73.1 S73.SW2
N$262: JA80.1 S80.SW2
N$263: JA81.1 S81.SW2
N$264: JA67.1 S67.SW2 S67B.SW2 S67C.SW1
N$265: JA59.1 S59.SW2
N$266: D64B.A JB74B.1
N$267: JA74B.1 S74.SW2
N$268: D87.A JB87.1
N$269: D88.A JB88.1
N$270: JB87.2 S87.SW1
N$271: JB88.2 S88.SW1
N$272: JA87.1 S87.SW2
N$273: JA88.1 S88.SW2
N$274: D89.A JB89.1
N$275: JB89.2 S89.SW1
N$276: JA89.1 S89.SW2
N$277: D90.A JB90.1
N$278: JB90.2 S90.SW1
N$279: JA90.1 S90.SW2
N$280: D91.A JB91.1
N$281: JB91.2 S91.SW1
N$282: JA91.1 S91.SW2
N$283: JB92.2 S92.SW1
N$284: D92.A JB92.1
N$285: JA92.1 S92.SW2
N$286: JA93.1 S93.SW2
N$287: JB93.2 S93.SW1
N$288: D93.A JB93.1
N$289: D94.A JB94.1
N$290: JB94.2 S94.SW1
N$291: JA94.1 S94.SW2
N$292: D95.A JB95.1
N$293: JB95.2 S95.SW1
N$294: JA95.1 S95.SW2
N$295: D96.A JB96.1
N$296: JB96.2 S96.SW1
N$297: JA96.1 S96.SW2
N$298: JB97.2 S97.SW1
N$299: JA97.1 S97.SW2
N$300: D97.A JB97.1
N$301: D98.A JB98.1
N$302: JB98.2 S98.SW1
N$303: JA98.1 S98.SW2
N$304: D99.A JB99.1
N$305: JB99.2 S99.SW1
N$306: JA99.1 S99.SW2
N$307: D100.A JB100.1
N$308: JB100.2 S100.SW1
N$309: JA100.1 S100.SW2
N$310: JB101.2 S101.SW1
N$311: D101.A JB101.1
N$312: JA101.1 S101.SW2
N$313: D102.A JB102.1
N$314: JB102.2 S102.SW1
N$315: JA102.1 S102.SW2
N$316: D103.A JB103.1
N$317: JB103.2 S103.SW1
N$318: JA103.1 S103.SW2
N$319: JB107.2 S107.SW1 S107B.SW1
N$320: JB104.2 S104.SW1
N$321: JA104.1 S104.SW2
N$322: JB105.2 S105.SW1
N$323: D105.A JB105.1
N$324: JA105.1 S105.SW2
N$325: D106.A JB106.1
N$326: JB106.2 S106.SW1
N$327: JA106.1 S106.SW2
N$328: D107.A JB107.1
N$329: JB108.2 S108.SW1
N$330: JA108.1 S108.SW2
N$331: D108.A JB108.1
N$332: JB109.2 S109.SW1
N$333: D109.A JB109.1
N$334: JA109.1 S109.SW2
N$335: D110.A JB110.1
N$336: JB110.2 S110.SW1
N$337: JA110.1 S110.SW2
R1: HL1.1 HL2.1
R2: HL3.1
VCC: IC1.4 IC1.6